# Allegro board Swan Carrier PCB v1.6.brd
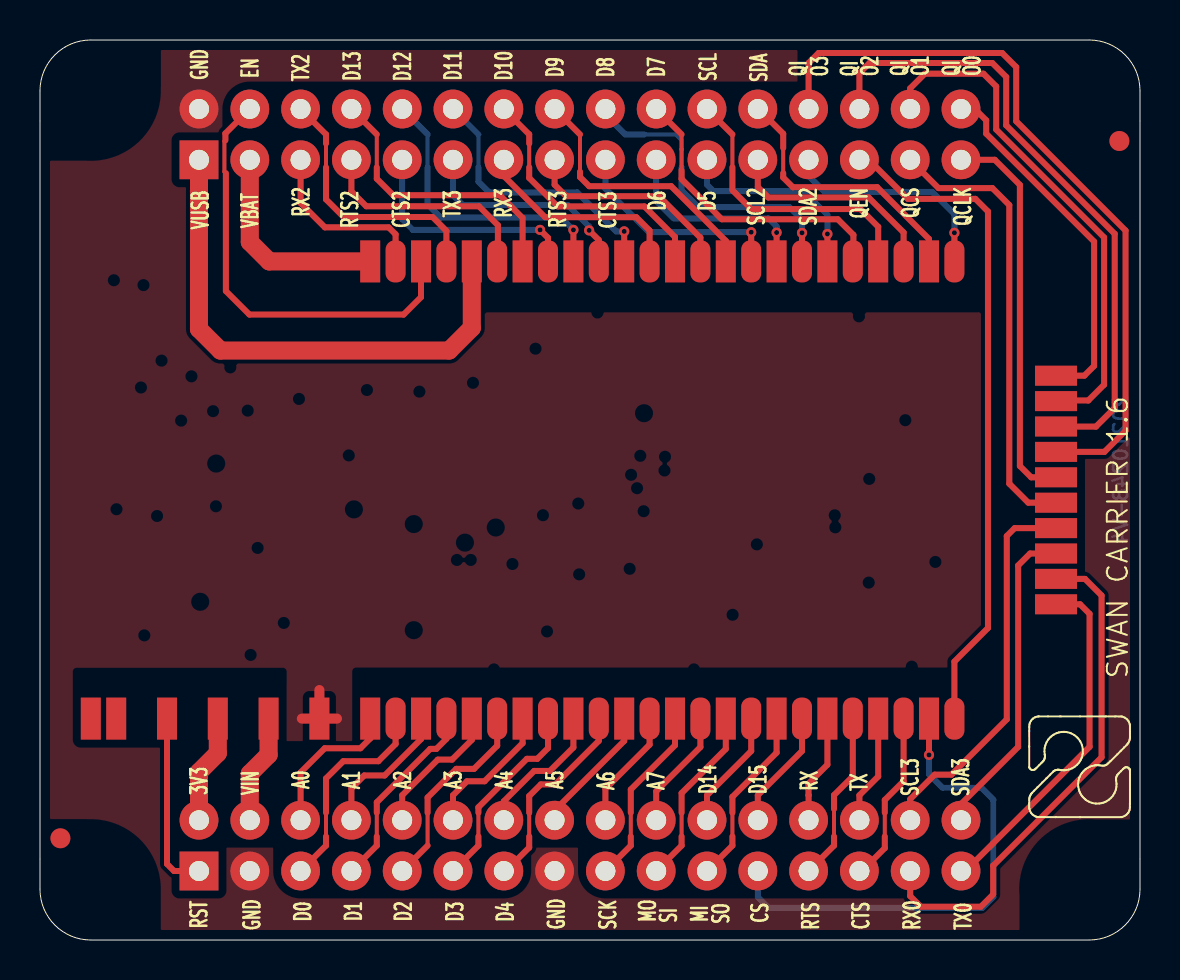
[diagram p0: board, top side]
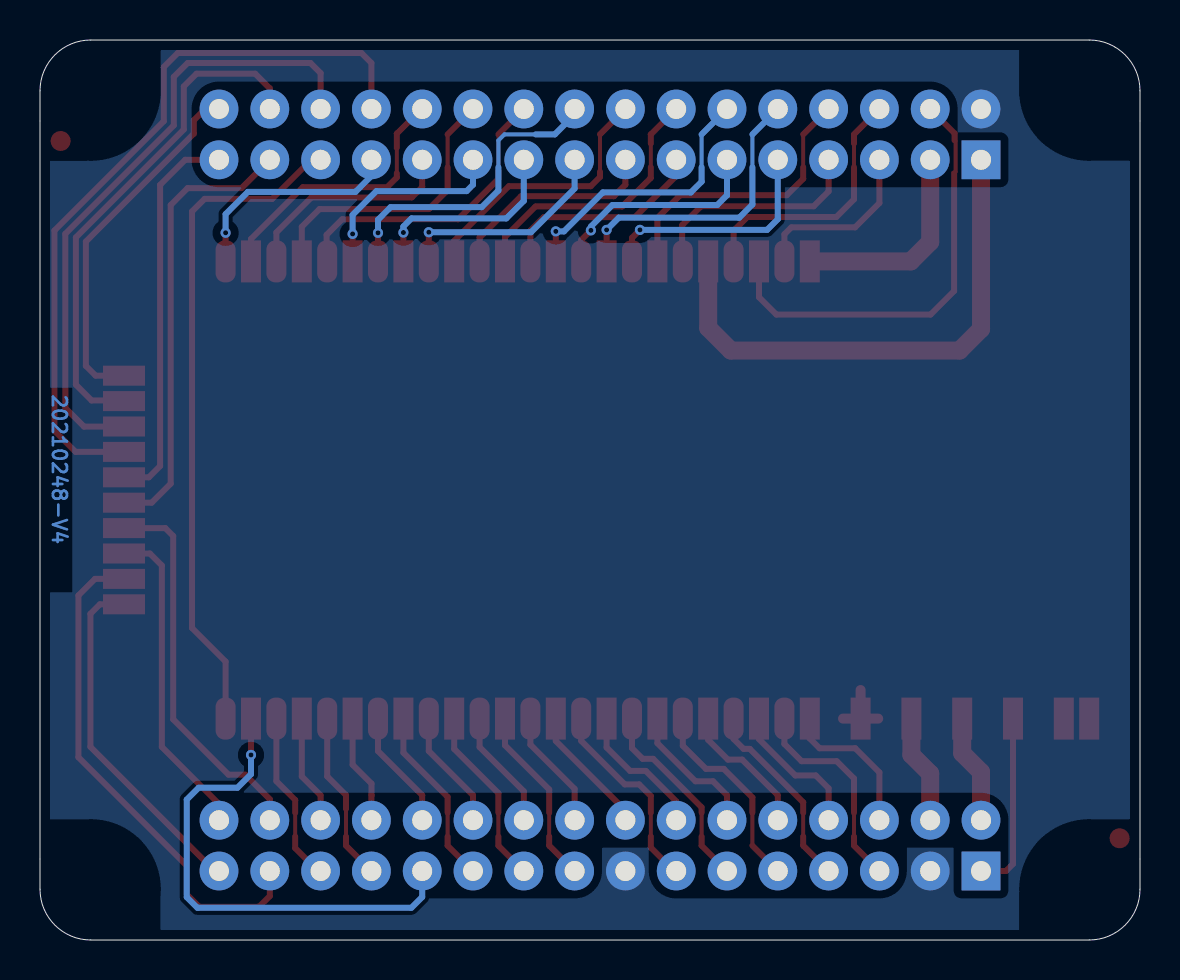
[diagram p1: board, bottom side, seen from below]

Outline 55 x 45 mm; copper layers: TOP, BOTTOM. Coordinates in mm from the lower left corner of the outline.
Outline path: 0,42.46 0,2.54 arc(0.74,0.74) 2.54,0 52.46,0 arc(54.26,0.74) 55,2.54 55,42.46 arc(54.26,44.26) 52.46,45 2.54,45 arc(0.74,44.26) 0,42.46

## Design rules (mm)
constraint set DEFAULT: min track width 0.3

## Placement (name value [footprint] x y rotation side)
FID1  TPS  [FIDUCIAL]  53.97 39.95 0 top
FID2  TPS  [FIDUCIAL]  1.02 5.09 90 top
J1  NU  [J-16X2-0254-MDT]  27 4.72 0 bottom
J2  NU  [J-16X2-0254-MDT]  27 40.28 0 bottom
MOD1  NU  [MOD-SWAN]  50.8 11.07 0 top
NOREF  -  [unnamed]  52.46 42.46 0 top
NOREF#2  -  [#2]  51.21 2.54 0 top
NOREF#3  -  [#2]  51.21 42.46 0 top
NOREF#4  -  [#2]  52.46 0 90 top
NOREF#5  -  [#2]  50.8 18.05 90 top
NOREF#6  -  [#2]  2.54 11.07 0 top
NOREF#7  -  [#2]  1.29 42.46 0 top
NOREF#8  -  [#2]  43.18 33.93 0 top
NOREF#9  -  [#2]  1.29 2.54 0 top
NOREF#10  -  [#2]  -110.87 -137.66 0 top
NOREF#11  -  [#2]  45.72 11.07 90 top
NOREF#12  -  [#2]  0 40.96 0 top
NOREF#13  -  [#2]  7.95 5.99 0 top
NOREF#14  -  [unnamed]  2.54 2.54 0 top
NOREF#15  -  [#2]  7.95 41.55 0 top
NOREF#16  -  [unnamed]  52.46 2.54 0 top
NOREF#17  -  [#2]  16.32 39.01 0 top
NOREF#18  -  [#2]  40.14 34.98 0 top
NOREF#19  -  [unnamed]  2.54 42.46 0 top
NOREF#20  -  [#2]  3.81 11.07 0 top
NOREF#21  -  [#2]  46.05 39.01 90 top
NOREF#22  -  [#2]  45.72 33.93 0 top
NOREF#23  -  [#2]  46.05 3.45 90 top
NOREF#24  -  [#2]  45.72 11.07 0 top
NOREF#25  -  [#2]  16.32 3.45 0 top
NOREF#26  -  [#2]  50.8 28.21 90 top
NOREF#27  -  [#2]  16.51 11.07 0 top
NOREF#28  -  [#2]  2.04 10.02 90 top

## Library data of the parts
FID1 FID2 = FIDUCIAL
J1 J2 = STRIP-J-16x2-0254 - MDT
MOD1 = MCU - SWAN_0

## Footprints (pads in the part's own frame, mm; a bottom-side part is the same pattern mirrored in y, then rotated)
FIDUCIAL
  round 1 smd: 1(0,0)
J-16X2-0254-MDT
  rect 1.94x1.94 hole 1: 1(-19.05,1.27)
  round 1.94 hole 1: 2(-19.05,-1.27) 3(-16.51,1.27) 4(-16.51,-1.27) 5(-13.97,1.27) 6(-13.97,-1.27) 7(-11.43,1.27) 8(-11.43,-1.27) 9(-8.89,1.27) 10(-8.89,-1.27) 11(-6.35,1.27) 12(-6.35,-1.27) 13(-3.81,1.27) 14(-3.81,-1.27) 15(-1.27,1.27) 16(-1.27,-1.27) 17(1.27,1.27) 18(1.27,-1.27) 19(3.81,1.27) 20(3.81,-1.27) 21(6.35,1.27) 22(6.35,-1.27) 23(8.89,1.27) 24(8.89,-1.27) 25(11.43,1.27) 26(11.43,-1.27) 27(13.97,1.27) 28(13.97,-1.27) 29(16.51,1.27) 30(16.51,-1.27) 31(19.05,1.27) 32(19.05,-1.27)
MOD-SWAN
  rect 1x2.1 smd: 1(-44.45,0) 2(-41.91,0) 3(-39.37,0) 4(-36.83,0) 5(-34.29,0) 7(-31.75,0) 9(-29.21,0) 11(-26.67,0) 13(-24.13,0) 15(-21.59,0) 17(-19.05,0) 19(-16.51,0) 21(-13.97,0) 23(-11.43,0) 25(-8.89,0) 27(-6.35,0) 40(-6.35,22.86) 42(-8.89,22.86) 44(-11.43,22.86) 46(-13.97,22.86) 48(-16.51,22.86) 50(-19.05,22.86) 52(-21.59,22.86) 54(-24.13,22.86) 56(-26.67,22.86) 58(-29.21,22.86) 60(-31.75,22.86) 62(-34.29,22.86) 63(-48.26,0) 64(-46.99,0)
  rrect 1x2.1 smd: 6(-33.02,0) 8(-30.48,0) 10(-27.94,0) 12(-25.4,0) 14(-22.86,0) 16(-20.32,0) 18(-17.78,0) 20(-15.24,0) 22(-12.7,0) 24(-10.16,0) 26(-7.62,0) 28(-5.08,0) 39(-5.08,22.86) 41(-7.62,22.86) 43(-10.16,22.86) 45(-12.7,22.86) 47(-15.24,22.86) 49(-17.78,22.86) 51(-20.32,22.86) 53(-22.86,22.86) 55(-25.4,22.86) 57(-27.94,22.86) 59(-30.48,22.86) 61(-33.02,22.86)
  rect 2.1x1 smd: 29(0,5.715) 30(0,6.985) 31(0,8.255) 32(0,9.525) 33(0,10.795) 34(0,12.065) 35(0,13.335) 36(0,14.605) 37(0,15.875) 38(0,17.145)
unnamed
  round 0 hole 2.54 unplated: (0,0)

## Nets
+3V3_OUT: J1.2 MOD1.2
+VBAT: J2.3 MOD1.62
+VIN: J1.4 MOD1.3
GND: J1.3 J1.15 J2.2 MOD1.4
+VUSB: J2.1 MOD1.58(VUSB)
A0: J1.6 MOD1.5
A1: J1.8 MOD1.7
A2: J1.10 MOD1.9
A3: J1.12 MOD1.11
A4: J1.14 MOD1.13
A5: J1.16 MOD1.15
A6: J1.18 MOD1.16
A7: J1.20 MOD1.18
CS: J1.23 MOD1.27
CTS: J1.27 MOD1.26
CTS2: J2.9 MOD1.55
CTS3: J2.17 MOD1.47
D0: J1.5 MOD1.6
D1: J1.7 MOD1.8
D2: J1.9 MOD1.10
D3: J1.11 MOD1.12
D4: J1.13 MOD1.14
D5: J2.21 MOD1.44
D6: J2.19 MOD1.46
D7: J2.20 MOD1.43
D8: J2.18 MOD1.45
D9: J2.16 MOD1.48
D10: J2.14 MOD1.50
D11: J2.12 MOD1.52
D12: J2.10 MOD1.54
D13: J2.8 MOD1.56
D14: J1.22 MOD1.20
D15: J1.24 MOD1.22
EN: J2.4 MOD1.60
MISO: J1.21 MOD1.21
MOSI: J1.19 MOD1.19
QCLK: J2.31 MOD1.34
QCS: J2.29 MOD1.33
QEN: J2.27 MOD1.28
QIO0: J2.32 MOD1.38
QIO1: J2.30 MOD1.37
QIO2: J2.28 MOD1.36
QIO3: J2.26 MOD1.35
RST#: J1.1 MOD1.1
RTS: J1.25 MOD1.24
RTS2: J2.7 MOD1.57
RTS3: J2.15 MOD1.49
RX: J1.26 MOD1.23
RX0: J1.29 MOD1.30
RX2: J2.5 MOD1.61
RX3: J2.13 MOD1.51
SCK: J1.17 MOD1.17
SCL: J2.22 MOD1.42
SCL2: J2.23 MOD1.41
SCL3: J1.30 MOD1.32
SDA: J2.24 MOD1.40
SDA2: J2.25 MOD1.39
SDA3: J1.32 MOD1.31
TX: J1.28 MOD1.25
TX0: J1.31 MOD1.29
TX2: J2.6 MOD1.59
TX3: J2.11 MOD1.53

Pads without a net: FID1 1; FID2 1; MOD1 63 64

## Via types
v1: diameter 0.508, hole 0.254, TOP to BOTTOM, 10 vias

## Routing (per net, layer and track width the routed paths; a pad name or vN(x,y) marks a point on that pad's centre or on a via; arc(x,y) is an arc through that point)
+3V3_OUT: length 5.5
  TOP w0.9: MOD1.2 8.89,9.34 7.95,8.4 J1.2
+VBAT: length 10.5
  TOP w0.9: J2.3 10.49,34.9 11.46,33.93 MOD1.62
+VIN: length 5.5
  TOP w0.9: MOD1.3 11.43,9.26 10.49,8.32 J1.4
GND: length 3.2
  TOP w0.5: 13.09,11.07 MOD1.4 ; MOD1.4 13.97,12.5 ; MOD1.4 14.85,11.07
+VUSB: length 26.3
  TOP w0.9: J2.1 7.95,37.46 7.95,37.46 7.95,30.55 9.02,29.47 20.46,29.47 21.59,30.6 MOD1.58
A0: length 7.6
  TOP w0.3: MOD1.5 16.52,11.06 16.52,10.08 16.02,9.59 14.24,9.59 13.03,8.38 J1.6
A1: length 7.1
  TOP w0.3: MOD1.7 19.05,10.04 17.23,8.23 16.21,8.23 15.57,7.58 J1.8
A2: length 6.9
  TOP w0.3: MOD1.9 21.59,10.01 20.6,9.02 19.89,9.02 18.11,7.24 J1.10
A3: length 7
  TOP w0.3: MOD1.11 24.13,9.84 22.23,7.94 21.35,7.94 20.65,7.24 J1.12
A4: length 7
  TOP w0.3: MOD1.13 26.67,9.63 25.49,8.45 24.71,8.45 23.19,6.93 J1.14
A5: length 6.5
  TOP w0.3: J1.16 25.73,6.47 29.21,9.95 MOD1.15
A6: length 6
  TOP w0.3: MOD1.16 30.48,9.77 28.27,7.56 J1.18
A7: length 6
  TOP w0.3: MOD1.18 33.02,9.65 30.81,7.44 J1.20
CS: length 25.1
  TOP w0.3: 35.89,3.25 J1.23 ; MOD1.27 v1(44.45,9.25)
  BOTTOM w0.3: J1.23 35.89,2.15 36.43,1.61 47.13,1.61 47.66,2.14 47.66,7.02 47.07,7.61 45.13,7.61 44.45,8.29 v1(44.45,9.25)
CTS: length 8.6
  TOP w0.2: 42.24,5.17 42.24,6.37
  TOP w0.3: MOD1.26 43.18,7.94 42.24,7 42.24,6.37 ; J1.27 41.09,3.45 42.24,4.6 42.24,5.17
CTS2: length 11.8
  TOP w0.3: MOD1.55 25.4,35.11 v1(25,35.51)
  BOTTOM w0.3: J2.9 18.11,36.04 18.64,35.51 v1(25,35.51)
CTS3: length 11.1
  TOP w0.3: MOD1.47 v1(35.56,35.39)
  BOTTOM w0.3: v1(35.56,35.39) 30.45,35.39 28.27,37.57 J2.17
D0: length 10.6
  TOP w0.2: 14.3,5.17 14.3,6.37
  TOP w0.3: 14.3,6.37 14.3,8.08 15.16,8.94 16.92,8.94 17.78,9.8 MOD1.6 ; 14.3,5.17 14.3,4.72 J1.5
D1: length 9.8
  TOP w0.2: 16.84,5.17 16.84,6.37
  TOP w0.3: MOD1.8 20.32,10.06 19.82,9.56 19.51,9.56 16.84,6.89 16.84,6.37 ; 16.84,5.17 16.84,4.72 J1.7
D2: length 10.1
  TOP w0.2: 19.38,4.72 19.38,6.37
  TOP w0.3: MOD1.10 22.86,9.72 21.7,8.56 20.81,8.56 19.38,7.12 19.38,6.37 ; J1.9 19.38,4.72
D3: length 9.9
  TOP w0.2: 21.92,5.17 21.92,6.37
  TOP w0.3: MOD1.12 25.4,9.59 24.86,9.06 24.34,9.06 21.92,6.63 21.92,6.37 ; 21.92,5.17 21.92,4.72 J1.11
D4: length 10.1
  TOP w0.2: 24.46,6.37 24.46,6.3 24.46,6.3 24.46,5.17
  TOP w0.3: 24.46,5.17 24.46,4.62 23.29,3.45 J1.13 ; MOD1.14 27.94,9.96 25.76,7.78 25.04,7.78 24.46,7.2 24.46,6.37
D5: length 10.2
  TOP w0.3: MOD1.44 v1(39.37,35.3)
  BOTTOM w0.3: v1(39.37,35.3) 39.37,36.26 38.18,37.44 33.67,37.44 33.35,37.76 J2.21
D6: length 10.3
  TOP w0.3: MOD1.46 v1(36.83,35.37)
  BOTTOM w0.3: J2.19 30.81,36.96 31.69,36.08 36.42,36.08 36.83,35.67 v1(36.83,35.37)
D7: length 15.1
  TOP w0.2: 32.08,38.48 32.08,38.48 32.08,39.54 32.08,39.54 32.08,40.28
  TOP w0.3: MOD1.43 40.67,33.96 40.67,35.26 39.89,36.04 34.09,36.04 32.08,38.05 32.08,38.48 ; J2.20 32.08,40.28
D8: length 15.8
  TOP w0.3: MOD1.45 v1(38.1,35.36)
  BOTTOM w0.2: 32.08,38.63 32.08,39.98 31.78,40.28 30.21,40.28
  BOTTOM w0.3: J2.18 28.27,41.27 29.26,40.28 30.21,40.28 ; 32.08,38.63 32.08,37.48 32.91,36.64 37.47,36.64 38.1,36.01 v1(38.1,35.36)
D9: length 13.6
  TOP w0.2: 27,40.28 27,38.41
  TOP w0.3: J2.16 27,40.28 ; MOD1.48 34.29,34.96 31.56,37.69 27.46,37.69 27,38.15 27,38.41
D10: length 13.7
  TOP w0.2: 24.46,39.83 24.46,38.63
  TOP w0.3: MOD1.50 31.75,35.15 30.22,36.68 25.89,36.68 24.46,38.11 24.46,38.63 ; 24.46,39.83 24.46,40.28 J2.14
D11: length 14
  TOP w0.3: MOD1.52 v1(29.21,35.43)
  BOTTOM w0.2: 21.92,38.63 21.92,40.28
  BOTTOM w0.3: 21.92,40.28 J2.12 ; v1(29.21,35.43) 28.8,35.43 26.86,37.38 22.46,37.38 21.92,37.92 21.92,38.63
D12: length 14.7
  TOP w0.3: MOD1.54 v1(26.67,35.51)
  BOTTOM w0.2: 19.38,40.28 19.38,38.63
  BOTTOM w0.3: J2.10 19.38,40.28 ; v1(26.67,35.51) 26.06,36.12 20.04,36.12 19.38,36.77 19.38,38.63
D13: length 14.3
  TOP w0.2: 16.84,40.28 16.84,38.63
  TOP w0.3: MOD1.56 24.13,36.1 22.99,37.24 17.66,37.24 16.84,38.06 16.84,38.63 ; J2.8 16.84,40.28
D14: length 6
  TOP w0.3: MOD1.20 35.56,9.45 33.35,7.24 J1.22
D15: length 6
  TOP w0.3: MOD1.22 38.1,9.45 35.89,7.24 J1.24
EN: length 22
  TOP w0.2: 9.27,39.99 9.22,39.94 9.22,38.41 9.29,38.34
  TOP w0.3: 9.29,38.34 9.29,32.45 10.47,31.27 18.18,31.27 19.05,32.14 MOD1.60 ; 9.27,39.99 9.27,40.33 J2.4
MISO: length 9.1
  TOP w0.2: 34.62,5.17 34.62,6.37
  TOP w0.3: MOD1.21 36.83,9.37 34.62,7.16 34.62,6.37 ; J1.21 34.62,4.72 34.62,5.17
MOSI: length 9.1
  TOP w0.2: 32.08,5.17 32.08,6.37
  TOP w0.3: 32.08,6.37 32.08,7.34 34.29,9.55 MOD1.19 ; J1.19 32.08,4.72 32.08,5.17
QCLK: length 19.6
  TOP w0.3: J2.31 47.74,39.01 48.99,37.75 48.99,23.7 49.56,23.14 50.8,23.14
QCS: length 22.6
  TOP w0.3: J2.29 44.93,37.59 47.62,37.59 48.47,36.75 48.47,22.82 49.42,21.86 50.8,21.86
QEN: length 33.6
  TOP w0.3: J2.27 40.99,39.03 41.42,39.03 43.39,37.06 46.77,37.06 47.4,36.43 47.4,15.6 45.72,13.92 MOD1.28
QIO0: length 18.1
  TOP w0.3: MOD1.38 50.8,28.22 52.22,28.22 52.71,28.7 52.71,34.92 47.31,40.32 47.31,40.98 46.74,41.55 J2.32
QIO1: length 25.8
  TOP w0.3: J2.30 43.51,42.58 44.24,43.32 47.17,43.32 47.81,42.68 47.81,40.53 53.21,35.13 53.21,27.77 52.42,26.98 50.83,26.98 MOD1.37
QIO2: length 31.8
  TOP w0.3: MOD1.36 50.81,25.67 52.8,25.67 53.74,26.61 53.74,35.31 48.31,40.73 48.31,43.15 47.61,43.85 41.48,43.85 40.97,43.34 J2.28
QIO3: length 37.5
  TOP w0.3: MOD1.35 53.22,24.41 54.28,25.46 54.28,35.47 48.81,40.94 48.81,43.65 48.11,44.35 38.93,44.35 38.43,43.85 J2.26
RST#: length 9
  TOP w0.3: J1.1 6.7,3.45 6.35,3.8 MOD1.1
RTS: length 8.5
  TOP w0.2: 39.7,5.17 39.7,6.55
  TOP w0.3: 39.7,5.17 39.7,4.72 J1.25 ; MOD1.24 40.64,8.18 39.7,7.24 39.7,6.55
RTS2: length 11.4
  TOP w0.3: MOD1.57 22.9,33.97 22.9,35.74 21.95,36.69 16.32,36.69 15.57,37.43 J2.7
RTS3: length 10.8
  TOP w0.3: J2.15 25.73,37.76 26.3,37.19 30.95,37.19 33.02,35.12 MOD1.49
RX: length 5.5
  TOP w0.3: J1.26 38.43,7.24 38.42,7.24 38.42,7.82 39.37,8.77 MOD1.23
RX0: length 25.7
  TOP w0.3: MOD1.30 52.25,18.05 53.08,17.23 53.08,9.14 47.66,3.72 47.66,2.28 47.04,1.66 44.04,1.66 43.51,2.2 J1.29
RX2: length 8.9
  TOP w0.3: J2.5 13.03,36.85 14.25,35.63 17.43,35.63 17.78,35.29 MOD1.61
RX3: length 10.8
  TOP w0.3: J2.13 23.19,38.2 25.25,36.14 29.81,36.14 30.48,35.47 MOD1.51
SCK: length 9.1
  TOP w0.2: 29.54,5.17 29.54,6.37
  TOP w0.3: 29.54,5.17 29.54,4.72 J1.17 ; MOD1.17 31.75,9.74 29.54,7.53 29.54,6.37
SCL: length 14.4
  TOP w0.2: 34.62,40.28 34.62,38.63
  TOP w0.3: MOD1.42 41.91,35.66 41.02,36.55 35.56,36.55 34.62,37.49 34.62,38.63 ; J2.22 34.62,40.28
SCL2: length 11
  TOP w0.3: MOD1.41 43.18,35.38 41.43,37.13 36.41,37.13 35.89,37.65 J2.23
SCL3: length 19.3
  TOP w0.3: MOD1.32 48.74,20.59 48.34,20.2 48.34,11.03 45.57,8.27 44.74,8.27 43.51,7.04 J1.30
SDA: length 13.7
  TOP w0.2: 37.16,39.61 37.16,38.34
  TOP w0.3: MOD1.40 44.45,35.05 41.86,37.64 37.64,37.64 37.16,38.12 37.16,38.34 ; 37.16,39.61 37.16,40.31 35.92,41.55 J2.24
SDA2: length 11.2
  TOP w0.3: v1(45.72,35.36) MOD1.39
  BOTTOM w0.3: v1(45.72,35.36) 45.72,36.29 44.61,37.4 39.23,37.4 38.43,38.2 J2.25
SDA3: length 16.1
  TOP w0.3: 50.8,19.32 49.51,19.32 48.91,18.73 48.91,9.66 46.05,6.8 J1.32
TX: length 5.5
  TOP w0.3: J1.28 40.97,7.24 41.91,8.18 MOD1.25
TX0: length 17.5
  TOP w0.3: MOD1.29 52,16.79 52.48,16.31 52.48,9.66 46.27,3.45 J1.31
TX2: length 13.2
  TOP w0.2: 14.3,38.63 14.3,39.83
  TOP w0.3: 14.3,38.63 14.3,37.03 15.18,36.15 19.63,36.15 20.32,35.46 MOD1.59 ; J2.6 14.3,40.28 14.3,39.83
TX3: length 11.2
  TOP w0.3: v1(27.46,35.48) 27.94,35 MOD1.53
  BOTTOM w0.3: J2.11 20.65,37.24 21.14,36.75 26.38,36.75 27.46,35.67 v1(27.46,35.48)

## Copper pours and planes (outline as drawn; the poured copper is in the pictures)
GND on TOP: 40.54,44.5 52.46,44.5 53.9,43.9 54.5,42.46 54.5,6.03 52.64,6.03 52.5,5.97 52.44,5.83 52.44,3.62 52.5,3.48 52.64,3.42 54.5,3.42 54.5,2.54 53.9,1.1 52.46,0.5 50.96,0.5 50.96,2.41 50.9,2.55 50.76,2.61 49.18,2.61 49.03,2.55 48.98,2.41 48.98,0.5 6.04,0.5 6.04,2.34 5.98,2.48 5.84,2.54 3.62,2.54 3.48,2.48 3.42,2.34 3.42,0.5 2.54,0.5 1.1,1.1 0.5,2.54 0.5,4.25 2.32,4.25 2.46,4.31 2.52,4.45 2.52,5.84 2.46,5.98 2.32,6.04 0.5,6.04 0.5,38.97 2.4,38.97 2.54,39.02 2.6,39.17 2.6,41.24 2.54,41.38 2.4,41.44 0.5,41.44 0.5,42.46 0.84,43.59 1.76,44.34 1.76,42.62 1.82,42.48 1.96,42.42 5.84,42.42 5.98,42.48 6.04,42.62 6.04,44.5 37.87,44.5 37.87,42.91 37.93,42.77 38.07,42.71 40.34,42.71 40.49,42.77 40.54,42.91 ; 4 cut-outs
GND on BOTTOM: 6.04,44.5 48.97,44.5 48.97,42.65 49.03,42.51 49.17,42.45 52.61,42.45 52.75,42.51 52.81,42.65 52.81,44.47 54.02,43.77 54.5,42.46 54.5,41.93 52.66,41.93 52.52,41.87 52.46,41.73 52.46,39.16 52.52,39.02 52.66,38.96 54.5,38.96 54.5,6.03 52.65,6.03 52.51,5.97 52.45,5.83 52.45,5.38 52.51,5.24 52.65,5.18 54.5,5.18 54.5,2.54 54.05,1.27 52.91,0.55 52.91,2.17 52.85,2.31 52.71,2.37 49.17,2.37 49.03,2.31 48.97,2.17 48.97,0.5 6.04,0.5 6.04,2.36 5.98,2.5 5.84,2.56 4.44,2.56 4.29,2.5 4.24,2.36 4.24,0.5 2.54,0.5 1.1,1.1 0.5,2.54 0.5,4.6 2.34,4.6 2.48,4.65 2.54,4.8 2.54,5.84 2.48,5.98 2.34,6.04 0.5,6.04 0.5,38.97 2.39,38.97 2.53,39.02 2.59,39.17 2.59,39.89 2.53,40.03 2.39,40.09 0.5,40.09 0.5,42.02 5.84,42.02 5.98,42.08 6.04,42.22

## Text on the board
BOTTOM: 20210248-V4
Ref Des/Silkscreen Top: 3V3 | RST | GND | VUSB | VBAT | EN | VIN | TX2 | A0 | RX2 | D0 | RTS2 | A1 | D13 | D1 | CTS2 | D12 | A2 | D2 | TX3 | D11 | A3 | D3 | RX3 | D10 | A4 | D4 | A5 | D9 | RTS3 | D8 | A6 | CTS3 | SCK | MO | A7 | D7 | D6 | SI | MI | D5 | D14 | SCL | SO | SCL2 | D15 | SDA | CS | QI | SDA2 | RX | RTS | O3 | TX | QEN | CTS | O2 | SCL3 | QCS | RX0 | O1 | SDA3 | QCLK | TX0 | O0 | SWAN CARRIER 1.6
XSECTION_CHART: *  SURFACE - AIR 0 MM | * SOLDERMASK_TOP MASK - SOLDERMASK 0.02 MM | L1 TOP CONDUCTOR - COPPER 0.035 MM | *  DIELECTRIC - FR-4 1.514 MM | L2 BOTTOM CONDUCTOR - COPPER 0.035 MM | * SOLDERMASK_BOTTOM MASK - SOLDERMASK 0.02 MM | DESIGN CROSS SECTION CHART | ___________________________ | TOTAL THICKNESS 1.624 MM | 1-2
User.11: Put PCB data code and/or manufacturer logo | on BOTTOM side
User.18: FIGURE | FINISHED SIZE | 0.254 | 1.0 | 2.54 | ALL UNITS ARE IN MILLIMETERS | TOLERANCE | +0.075/-0.075 | TYPE | PLATED | NON-PLATED | QTY | 10 | 64 | 4 | DRILL CHART: TOP to BOTTOM
